# EAGLE board power (EAGLE 8.2.1)

Size 100 x 80 mm. Coordinates in mm from the lower left corner, seen from the top.
Outline: 0,0 100,0 100,80 0,80 0,0
Copper layers (1*16): Top 0.035mm / dielectric 1.5mm / Bottom 0.035mm
Design rules "default": minimum track width 6mil, minimum drill 0.35mm, track to track 6mil, track to pad 6mil, pad to pad 6mil, via to via 6mil, smd to smd 6mil, copper to edge 40mil, drill to drill 6mil, minimum pad ring 10mil, minimum via ring 8mil, stop-mask expansion 4mil, vias tented up to drill 0mil, thermal gap 10mil

## Footprints (pad centres in the part's own frame; a part is rotated, then mirrored left to right if it is on the bottom)
C1206 = smd 1.6 x 1.8: 1 -1.4,0; 2 1.4,0
LED_BARGRAPH_10 = drill 0.813 long: 1 -11.43,-3.81; 2 -8.89,-3.81; 3 -6.35,-3.81; 4 -3.81,-3.81; 5 -1.27,-3.81; 6 1.27,-3.81; 7 3.81,-3.81; 8 6.35,-3.81; 9 8.89,-3.81; 10 11.43,-3.81; 11 11.43,3.81; 12 8.89,3.81; 13 6.35,3.81; 14 3.81,3.81; 15 1.27,3.81; 16 -1.27,3.81; 17 -3.81,3.81; 18 -6.35,3.81; 19 -8.89,3.81; 20 -11.43,3.81
SO14 = smd 0.6 x 2.2: 1 -3.81,-2.6; 2 -2.54,-2.6; 3 -1.27,-2.6; 4 0,-2.6; 5 1.27,-2.6; 6 2.54,-2.6; 7 3.81,-2.6; 8 3.81,2.6; 9 2.54,2.6; 10 1.27,2.6; 11 0,2.6; 12 -1.27,2.6; 13 -2.54,2.6; 14 -3.81,2.6
M1206 = smd 1.6 x 2: 1 -1.4,0; 2 1.4,0
SOT223 = smd 1.219 x 2.235: 1 -2.311,-3.099; 2 0,-3.099; 3 2.311,-3.099 | smd 3.6 x 2.2: 4 0,3.099

## Placement (x,y rotation side)
C1  0.1u  [C1206]  -36.83,17.78 0 top  (outside the outline)
C2  0.1u  [C1206]  -43.18,17.78 0 top  (outside the outline)
D2  RED  [LED_BARGRAPH_10]  -26.67,7.62 0 top  (outside the outline)
IC1  LM324D  [SO14]  57.15,50.8 0 top
R1  10k  [M1206]  -27.94,27.94 0 top  (outside the outline)
R2  3.3k  [M1206]  -22.86,27.94 0 top  (outside the outline)
R3  10k  [M1206]  -33.02,27.94 0 top  (outside the outline)
R4  10k  [M1206]  -38.1,27.94 0 top  (outside the outline)
R5  10k  [M1206]  -43.18,27.94 0 top  (outside the outline)
R6  10k  [M1206]  -15.24,34.29 0 top  (outside the outline)
R7  10k  [M1206]  -20.32,34.29 0 top  (outside the outline)
R8  10k  [M1206]  -25.4,34.29 0 top  (outside the outline)
R9  10k  [M1206]  -30.48,34.29 0 top  (outside the outline)
R10  10k  [M1206]  -35.56,34.29 0 top  (outside the outline)
R11  10k  [M1206]  -40.64,34.29 0 top  (outside the outline)
U1  [SOT223]  -16.51,19.05 0 top  (outside the outline)

## Library data of the parts
C1 C2 = rcl
D2 = SparkFun-LED; PROD_ID: DIO-10615
IC1 = linear
R1-R11 = resistor
U1 = SparkFun-IC-Power; PROD_ID: VREG-08170

## Nets
GND: C2.2 D2.11 D2.12 D2.13 D2.14 D2.15 D2.16 D2.17 D2.18 D2.19 D2.20 R2.2 R7.2
N$1: R3.2 R4.1
N$2: C1.2 C2.1 IC1.3 IC1.5 IC1.10 IC1.12 R1.2 R2.1
N$3: IC1.2 R4.2 R5.1 R8.1
N$4: R5.2 R6.1 R11.2
N$5: R6.2 R7.1
N$6: IC1.6 R8.2 R9.1
N$7: IC1.9 R9.2 R10.1
N$8: IC1.13 R10.2 R11.1
N$9: D2.1 D2.2 D2.3 IC1.1
N$10: D2.4 D2.5 D2.6 IC1.7
N$11: D2.7 D2.8 IC1.8
N$12: D2.9 D2.10 IC1.14
V+: IC1.4
V-: IC1.11
VCC: C1.1 R1.1 R3.1

## Tracks (layer width: path | path; a pad name or v marks a point on that pad's centre or on a via)
GND  (12 unrouted)
N$1  (1 unrouted)
N$2  (7 unrouted)
N$3  (3 unrouted)
N$4  (2 unrouted)
N$5  (1 unrouted)
N$6  (2 unrouted)
N$7  (2 unrouted)
N$8  (2 unrouted)
N$9  (3 unrouted)
N$10  (3 unrouted)
N$11  (2 unrouted)
N$12  (2 unrouted)
VCC  (2 unrouted)